# Altium PCB pcb_layout_v1.PcbDoc
Units mm, origin at the board's own origin, x right, y up, seen from the top; angles counter-clockwise.
Board outline 41.78 x 48.01 mm, 2 copper layers (Top Layer, Bottom Layer); 38 components, 28 nets, 95 pads, 10 vias.
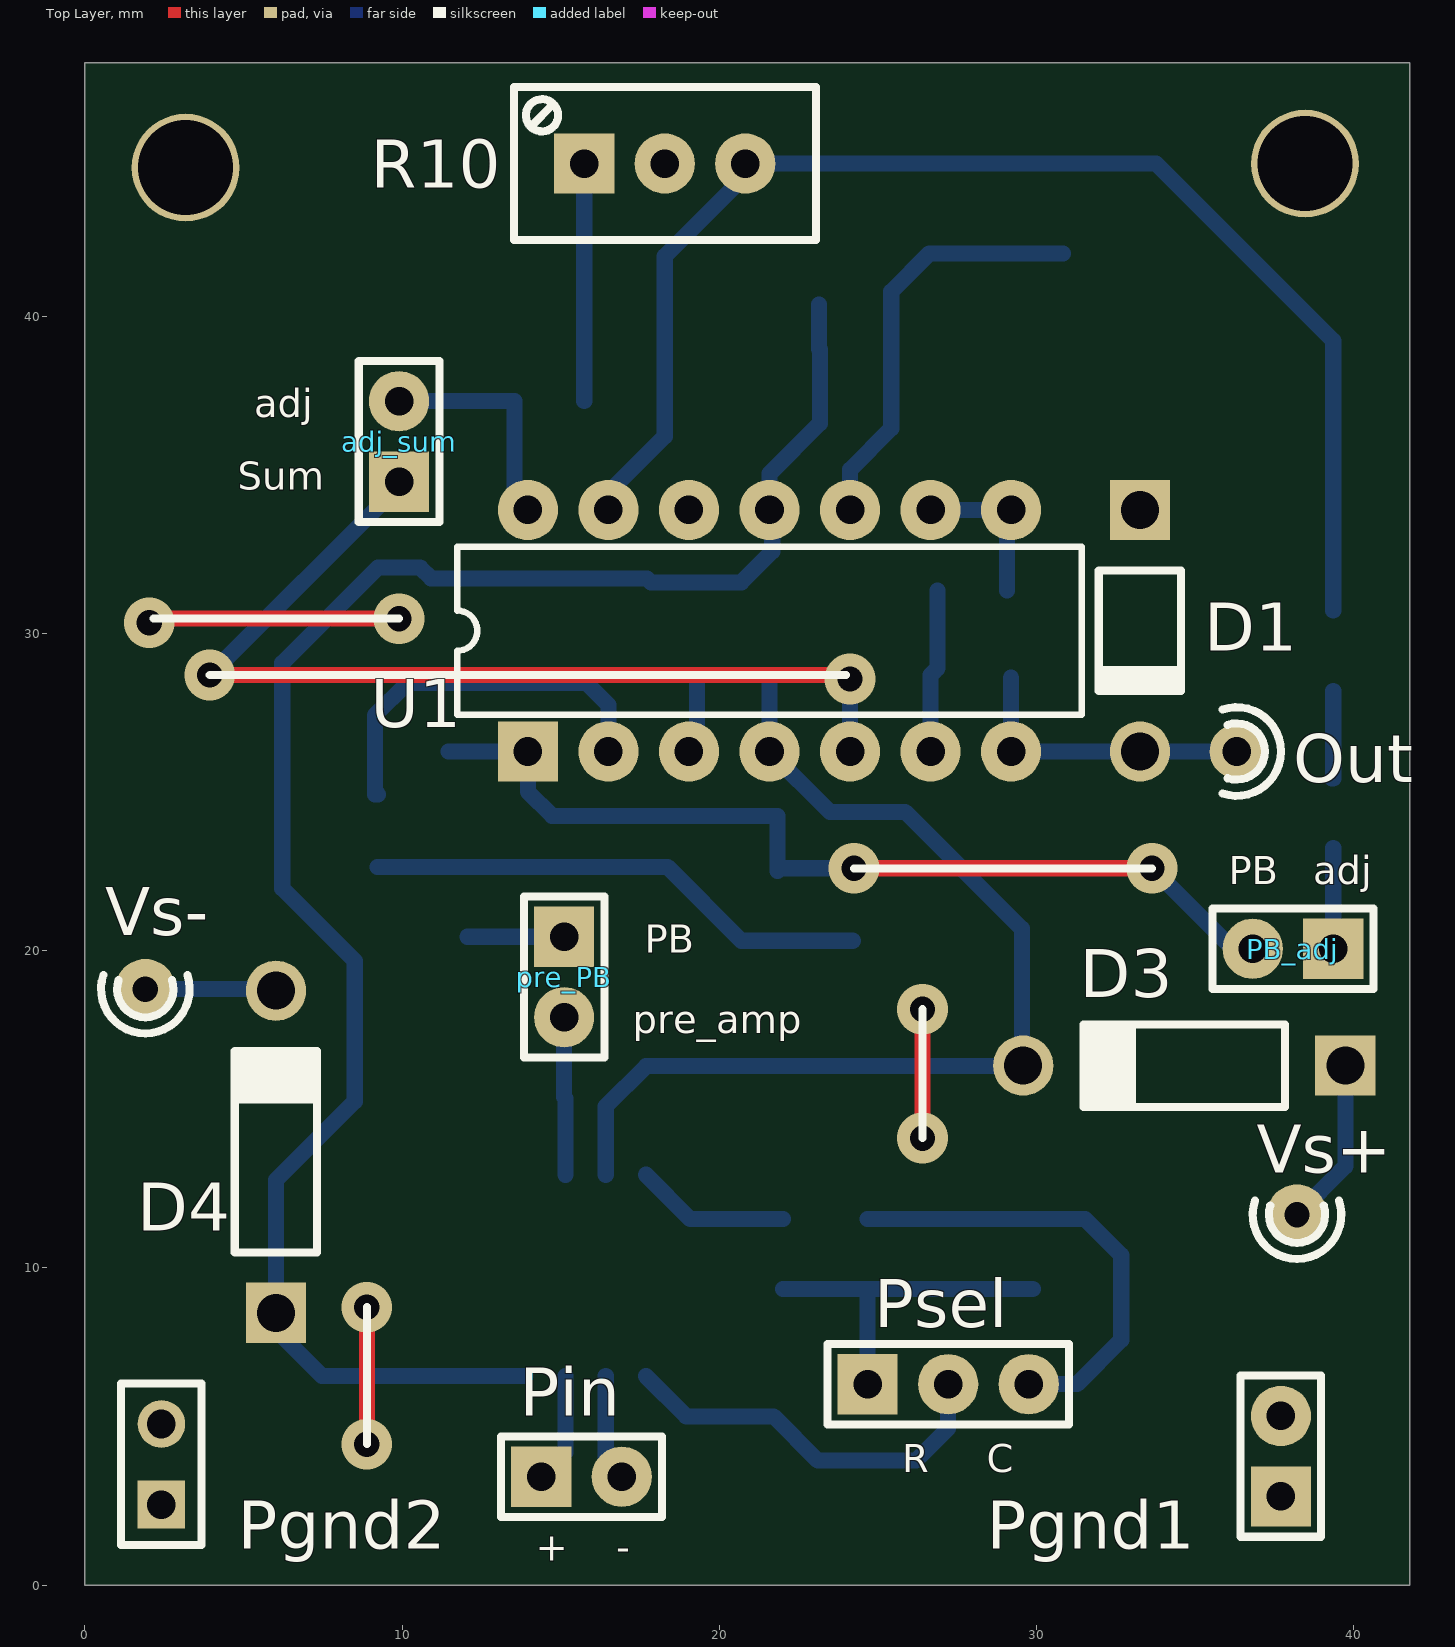
[diagram p0: Top Layer view]
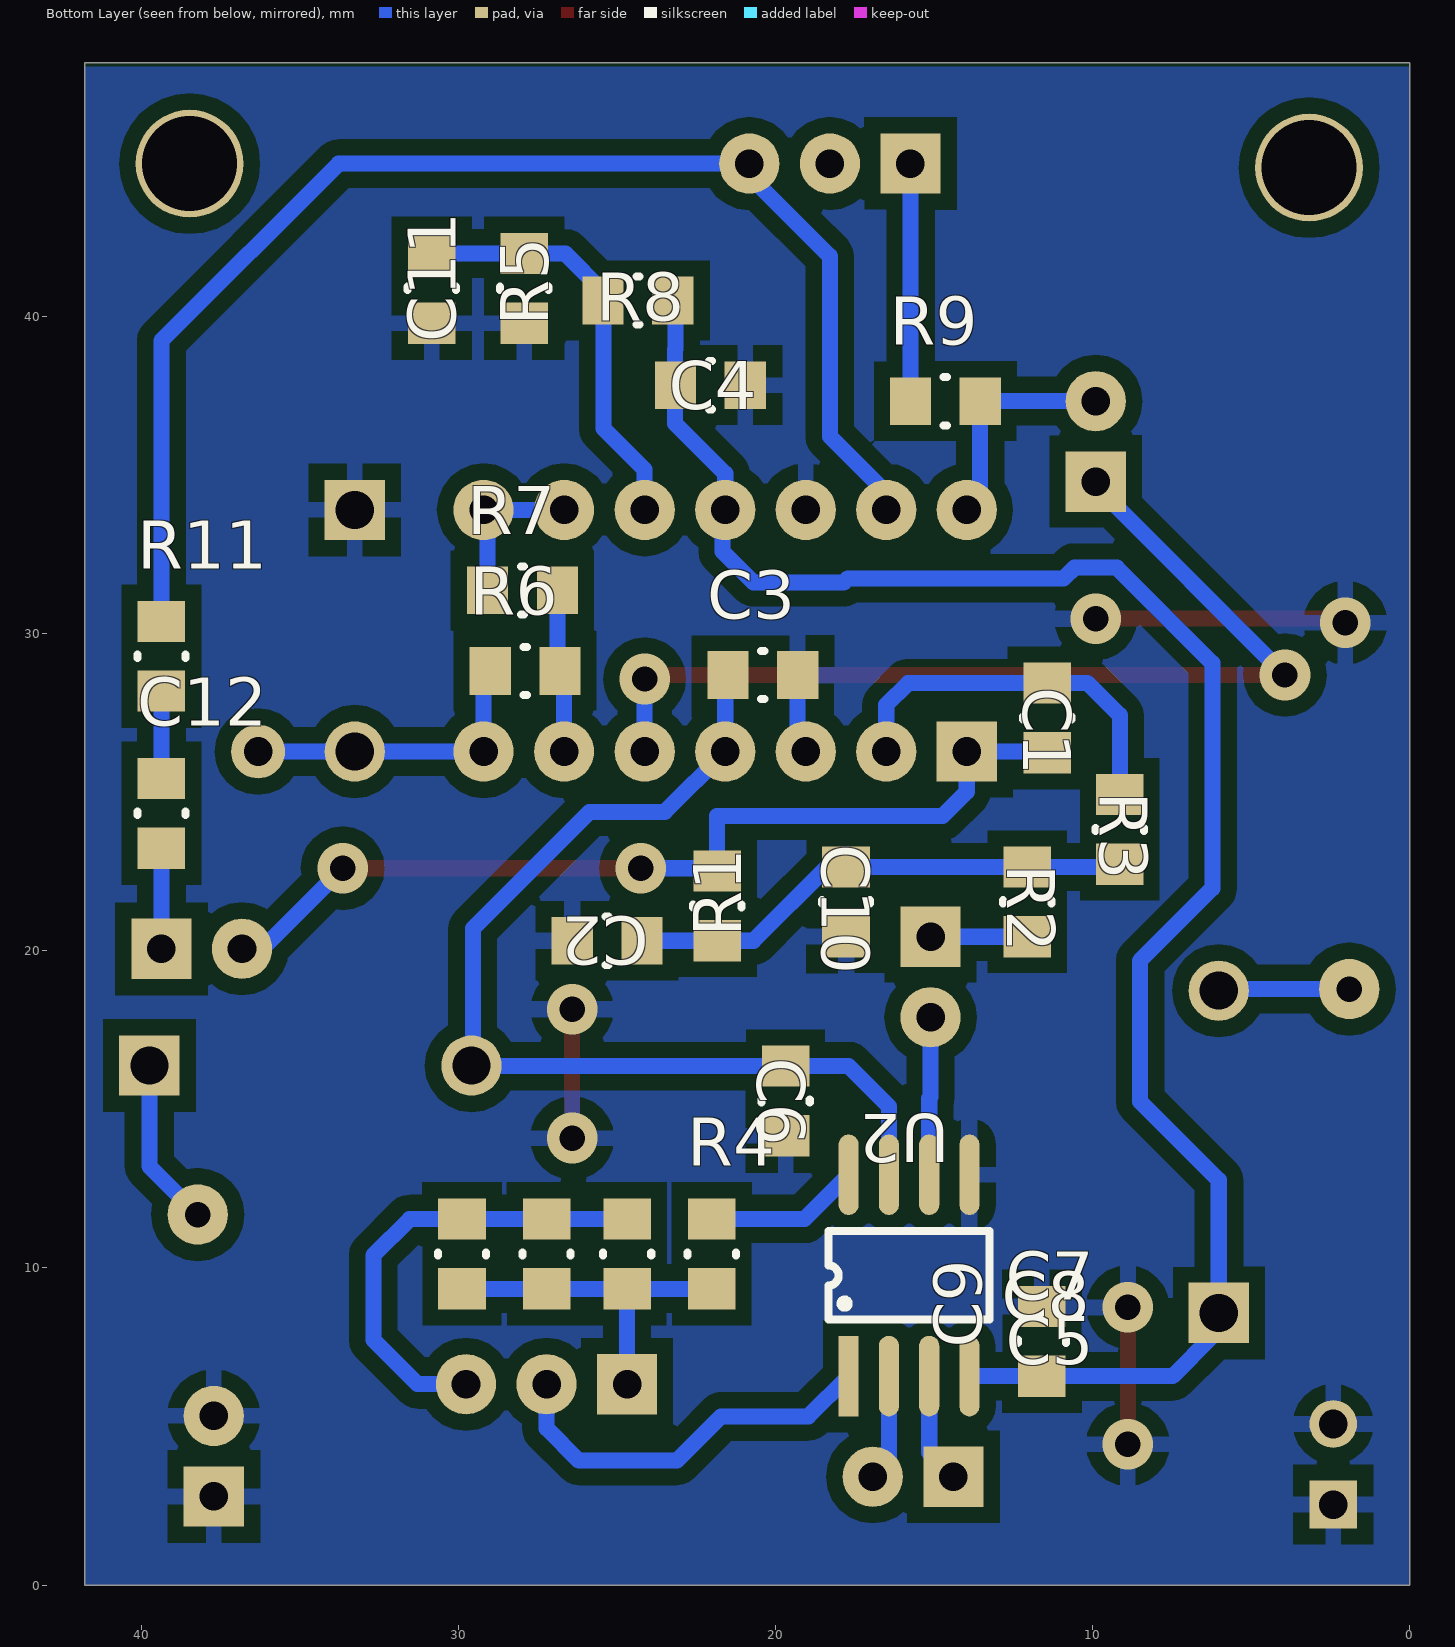
[diagram p1: Bottom Layer view, seen from below]
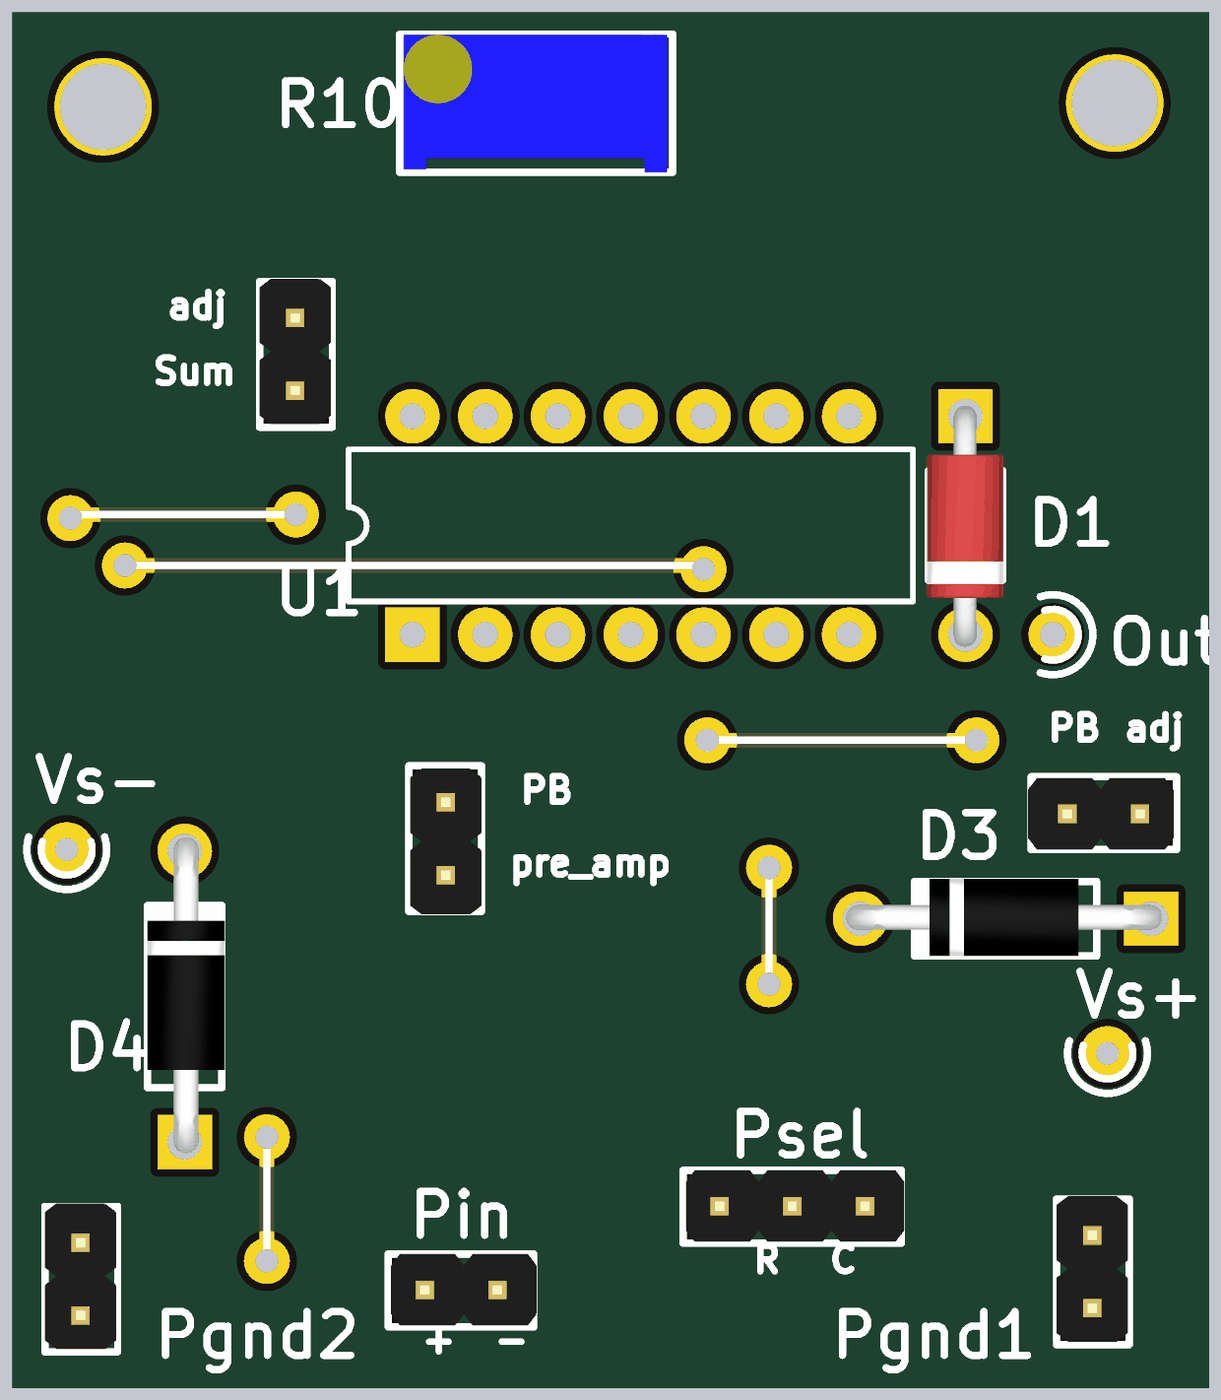
[diagram p2: 3D render of the assembled board from above, using the file's embedded part models]
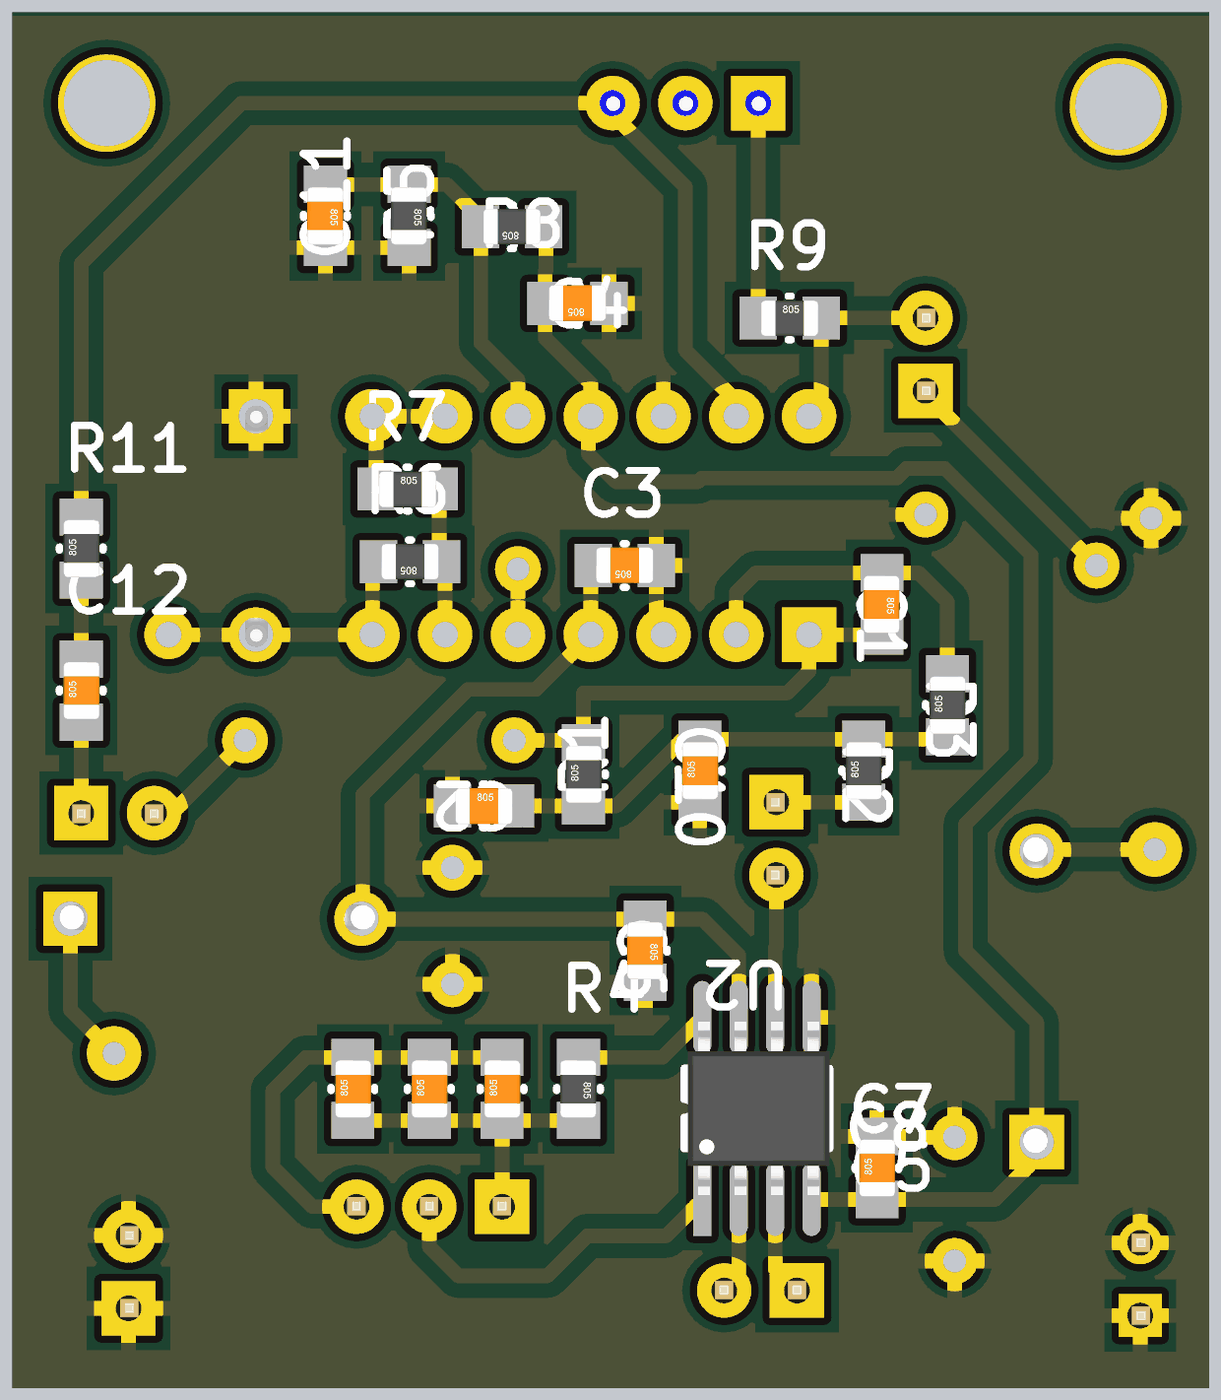
[diagram p3: 3D render of the assembled board from below, using the file's embedded part models]

## Layer stack, top to bottom
Top Solder: solder mask 0.0102, Solder Resist, Dk 3.5
Top Layer: signal copper 0.0356
Dielectric 1: dielectric 0.32, FR-4, Dk 4.8
Bottom Layer: signal copper 0.0356
Bottom Solder: solder mask 0.0102, Solder Resist, Dk 3.5

## Board outline
0,0 0,48.006 41.783,48.006 41.783,0

## Design rules (kind name [scope] priority, off if disabled: settings)
Clearance [All] p1: gap=0.508
PlaneConnect PlaneConnect_1 [All] p1: planeconnectstyle=Relief reliefexpansion=0.508 reliefentries=4 reliefconductorwidth=0.254 reliefairgap=0.254
PolygonConnect [All] p1: connectstyle=Relief reliefconductorwidth=0.508 reliefentries=4 polygonreliefangle="90 Angle" airgapwidth=0.508
RoutingVias [All] p1: holewidth=0.711 width=1.27 viastyle="Through Hole" minholewidth=0.711 minwidth=1.27 maxholewidth=1.016 maxwidth=1.778
SolderMaskExpansion [All] p1: expansion=0.254 soldermaskfromhole=TRUE
Width [All] p1: maxlimit=0.508 minlimit=0.508 preferedwidth=0.508 minimp=50.000000 maximp=50.000000 favimp=50.000000
29 further rules are at their usual default settings.

## Classes and differential pairs
component class Designator: C5 C6 C7 C8 C9 Pin Psel R4 U2
component class not_sure_yet: D3 D4 pre_PB

## Components (designator, comment, footprint, x,y, rotation, side; value= is the part's Value field where it differs from the comment)
adj_sum "Header_1x2" HDR-M-1x2-2.54mm-180-9.2mm#1 9.906,34.798 r90 top
C1 "1,2pF" 0805C 11.43,28.448 r270 bottom
C2 "22nF" 0805C 26.416,20.32 r180 bottom
C3 "100nF" 0805C 19.304,28.702 r0 bottom
C4 "100nF" 0805C 20.955,37.846 r0 bottom
C5 "4.7uF" 0805C 27.224,9.344 r90 bottom
C6 "100nF" 0805C 19.685,16.37 r270 bottom
C7 "2.2uF" 0805C 24.684,9.344 r90 bottom
C8 "100nF" 0805C 29.891,9.344 r90 bottom
C9 "100nF" 0805C 11.601,6.589 r90 bottom
C10 "15nF" 0805C 17.78,20.447 r90 bottom
C11 "100nF" 0805C 30.849,41.996 r270 bottom
C12 "100nF" 0805C 39.37,23.241 r90 bottom
D1 "1N4728A" DO-41-Glass 33.274,33.909 r270 top
D3 "1N5819" DO-41-Plastic 39.751,16.383 r180 top
D4 "1N5819" DO-41-Plastic 6.024,8.586 r90 top
Out "TestPoint" TEST_POINT_PTH#1 36.322,26.289 r90 top (schematic designator TP1)
PB_adj "Header_1x2" HDR-M-1x2-2.54mm-180-9.2mm#1 39.37,20.066 r180 top
Pgnd1 "Header_1x2" HDR-M-1x2-2.54mm-180-9.2mm#1 37.719,2.794 r90 top
Pgnd2 "Header_1x2" HDR-M-1x2-2.54mm-180-9.2mm#2 2.413,2.54 r90 top
Pin "Header_1x2" HDR-M-1x2-2.54mm-180-9.2mm#1 14.393,3.416 r0 top
pre_PB "Header_1x2" HDR-M-1x2-2.54mm-180-9.2mm#1 15.113,20.447 r270 top
Psel "Header_1x3" HDR-M-1x3-2.54mm-180-9.2mm 24.684,6.337 r0 top
R1 "220k" 0805R 21.844,20.32 r90 bottom
R2 "18k" 0805R 12.065,20.447 r90 bottom
R3 "39k" 0805R 9.144,22.733 r90 bottom
R4 "2k" 0805R 22.017,11.544 r270 bottom
R5 "330k" 0805R 27.928,41.996 r270 bottom
R6 "10k" 0805R 26.797,28.829 r0 bottom
R7 "10k" 0805R 29.083,31.369 r180 bottom
R8 "680k" 0805R 23.241,40.513 r0 bottom
R9 "510" 0805R 15.748,37.338 r180 bottom
R10 "10k" Trimpot-3296W 15.748,44.831 r0 top
R11 "1k" 0805R 39.37,28.194 r90 bottom
U1 "LM324N" N014 21.59,30.099 r0 top
U2 "INA118" SOIC08-150(50) 17.695,6.591 r180 bottom
Vs+ "TestPoint" TEST_POINT_PTH#2 38.227,11.684 r0 top
Vs- "TestPoint" TEST_POINT_PTH#2 1.905,18.796 r0 top

## Footprints (in the part's own frame and the unit in brackets; to place one, negate y for a bottom-side part, rotate by r counter-clockwise, add the part's x,y. Pads: shape width x height; smd on the part's side, far side on the other; paste and mask are expansions set on the pad)
0805C [mm] "Chip Capacitor; Body 2 x 1.3 mm (LxW typ)"
  rect 1.3x1.5 smd: 1(0,0) 2(2.2,0)
  silkscreen extent 1.05,-0.76 1.15,0.76, body extent 0.1,-0.64 2.1,0.61, height 0.78
0805R [mm] "Chip Resistor; Body 2 x 1.3 mm (LxW typ)"
  rect 1.3x1.5 smd: 1(0,0) 2(2.2,0)
  silkscreen extent 1.05,-0.76 1.15,0.76, body extent 0.1,-0.64 2.1,0.61, height 0.78
DO-41-Glass [mm] "Diode, Axial; Body 4.1 x 2.6 mm (LxDia. max), Lead Dia. 0.86 mm (max), Lead Spacing 7.62 mm; 3D Julien THIEREN"
  rect 1.9x1.9 hole 1.2: A(0,0)
  round 1.9 hole 1.2: K(7.62,0)
  silkscreen extent 1.9,-1.3 5.71,1.3, body extent -0.37,-1.35 8.04,1.32, height 2.81
DO-41-Plastic [mm] "Diode, Axial; Body 4.1 x 2.6 mm (LxDia. max), Lead Dia. 1.14 mm (max), Lead Spacing 10.16 mm; 3D Wagner Bernardo"
  rect 1.9x1.9 hole 1.2: A(0,0)
  round 1.9 hole 1.2: K(10.16,0)
  silkscreen extent 1.91,-1.33 8.26,1.3, body extent -0.38,-1.4 10.64,1.3, height 2.84
HDR-M-1x2-2.54mm-180-9.2mm#1 [mm] "Male Header, 1 line 2 rows, 180 degrees, 9.2 mm length"
  rect 1.9x1.9 hole 0.9: 1(0,0)
  round 1.9 hole 0.9: 2(2.54,0)
  silkscreen extent -1.27,-1.27 3.81,1.27, body extent -1.17,-1.22 3.91,1.27, height 6.2
HDR-M-1x2-2.54mm-180-9.2mm#2 [mm] "Male Header, 1 line 2 rows, 180 degrees, 9.2 mm length"
  rect 1.5x1.5 hole 0.9: 1(0,0)
  round 1.5 hole 0.9: 2(2.54,0)
  silkscreen extent -1.27,-1.27 3.81,1.27, body extent -1.17,-1.22 3.91,1.27, height 6.2
HDR-M-1x3-2.54mm-180-9.2mm [mm] "Male Header, 1 line 3 rows, 180 degrees, 9.2 mm length"
  rect 1.9x1.9 hole 0.9: 1(0,0)
  round 1.9 hole 0.9: 2(2.54,0) 3(5.08,0)
  silkscreen extent -1.27,-1.27 6.35,1.27, body extent -1.17,-1.22 6.45,1.27, height 6.2
N014 [mm] "DIP; 14 Leads; Row Spacing 7.62 mm; Pitch 2.54 mm"
  rect 1.9x1.9 hole 0.9: 1(-7.62,-3.81)
  round 1.9 hole 0.9: 2(-5.08,-3.81) 3(-2.54,-3.81) 4(0,-3.81) 5(2.54,-3.81) 6(5.08,-3.81) 7(7.62,-3.81) 8(7.62,3.81) 9(5.08,3.81) 10(2.54,3.81) 11(0,3.81) 12(-2.54,3.81) 13(-5.08,3.81) 14(-7.62,3.81)
  silkscreen extent -9.85,-2.65 9.85,2.65
SOIC08-150(50) [mm] "SOIC 8 Leads; Row Spacing 3.81 mm; Pitch 1.27 mm; 3D André L´Hérault"
  rect 0.635x2.54 smd: 1(0,0)
  oval 0.635x2.54 smd: 2(1.27,0) 3(2.54,0) 4(3.81,0) 5(3.81,6.35) 6(2.54,6.35) 7(1.27,6.35) 8(0,6.35)
  silkscreen extent -0.63,1.78 4.45,4.57, body extent -0.51,0.15 4.44,6.2, height 1.88
TEST_POINT_PTH#1 [mm] "Test Point PTH"
  round 1.7 hole 0.9: 1(0,0)
  silkscreen extent -1.4,-1.4 1.4,0.44
TEST_POINT_PTH#2 [mm] "Test Point PTH"
  round 1.9 hole 0.8: 1(0,0)
  silkscreen extent -1.4,-1.4 1.4,0.44
Trimpot-3296W [mm] "Trimpot 3296W"
  rect 1.9x1.9 hole 0.9: 1(0,0)
  round 1.9 hole 0.9: 2(2.54,0) 3(5.08,0)
  silkscreen extent -2.22,-2.41 7.3,2.41, body extent -2.09,-2.41 7.11,2.39, height 12.05

## Part data
adj_sum PB_adj Pgnd1 Pgnd2 Pin pre_PB: "Header, 1 Line, 2 Columns, 2 Pins"
C1 C2 C3 C4 C5 C6 C7 C8 C9 C10 C11 C12: library part Capacitor, "Capacitor"
D1: "Zener Diode"
D3 D4: library part 1N4007, "General Purpose Rectifier"
Out Vs+ Vs-: "Test Point"
Psel: "Header, 1 Line, 3 Columns, 3 Pins"
R1 R2 R3 R4 R5 R6 R7 R8 R9 R11: library part Resistor, "Resistor"
R10: library part Trimpot, "Trimpot"
U1: "Quadruple Operational Amplifier"
U2: "Precision, Low Power Instrumentation Amplifier"

## Free pads (board coordinates)
  round 3.4 hole 3: 0(3.175,44.704) 1(38.481,44.831)

## Via types
v1: diameter 1.6, hole 0.8, Top Layer to Bottom Layer, 10 vias

## Nets (pads, with @x,y where several pads share a name; then routed paths per layer and width w, separated by ;. In a path a pad name is that pad's centre, name@x,y a point inside that pad or via, vN(x,y) a via of type N, cw(c..) or ccw(c..) an arc to the next point about the centre after c; other vN are vias at no path point)
GND: C2.1 C3.1 C4.1 C6.2 C9.2 C10.1 C11.2 D1.A Pgnd1.1 Pgnd1.2 Pgnd2.1 Pgnd2.2 R5.2 U1.3 U1.12 U2.5 | length 18.8
  Top Layer w0.508: v1(2.032,30.353) 2.159,30.48 v1(9.906,30.48) ; v1(8.89,4.445) v1(8.89,8.763) ; v1(26.416,14.097) v1(26.416,18.161)
  Bottom Layer w0.508: U1.3 19.304,26.543 C3.1
Netadj_sum_1: adj_sum.1 U1.5 | length 31.8
  Top Layer w0.508: v1(3.937,28.702) 3.937,28.829 4.064,28.702 24.257,28.702 24.13,28.829 v1(24.13,28.575)
  Bottom Layer w0.508: v1@3.937,28.829 v1(3.937,28.702) adj_sum.1@9.906,34.671 ; U1.5 v1(24.13,28.575)
Netadj_sum_2: adj_sum.2 R9.2 U1.14 | length 7.2
  Bottom Layer w0.508: adj_sum.2 R9.2 13.548,34.331 U1.14
NetC1_1: C1.1 R3.2 U1.2 | length 12.2
  Bottom Layer w0.508: R3.2 9.244,24.933 9.144,25.033 9.144,27.432 10.16,28.448 C1.1 15.822,28.448 16.51,27.76 U1.2
NetC1_2: C1.2 PB_adj.2 R1.2 U1.1 | length 29.4
  Top Layer w0.508: v1(24.257,22.606) v1(33.655,22.606)
  Bottom Layer w0.508: C1.2@11.471,26.289 U1.1 ; U1.1@13.97,26.035 13.97,25.019 14.732,24.257 21.844,24.257 R1.2 ; R1.2@21.93,22.606 v1(24.257,22.606) ; v1(33.655,22.606) 36.195,20.066 PB_adj.2
NetC2_2: C2.2 C10.2 R1.1 R2.2 R3.1 | length 15.9
  Bottom Layer w0.508: R3.1@9.23,22.647 R2.2 C10.2 18.374,22.647 20.701,20.32 R1.1 C2.2
NetC5_2: C5.2 C7.2 C8.2 Psel.3 | length 14.6
  Bottom Layer w0.508: C7.2 C5.2 C8.2 31.542,11.544 32.685,10.401 32.685,7.734 31.288,6.337 Psel.3
NetC11_1: C11.1 R5.1 R8.2 U1.10 | length 13.3
  Bottom Layer w0.508: U1.10 24.13,35.179 25.429,36.478 25.429,40.796 26.629,41.996 R5.1 C11.1
NetC12_1: C12.1 PB_adj.1 | length 3.2
  Bottom Layer w0.508: PB_adj.1 C12.1
NetC12_2: C12.2 R11.1 | length 2.8
  Bottom Layer w0.508: C12.2@39.329,25.441 C12.2 R11.1
NetD1_K: D1.K Out.1 R6.2 U1.7 | length 9.2
  Bottom Layer w0.508: R6.2@29.21,28.616 U1.7 D1.K Out.1@36.068,26.289
NetD3_A: D3.A Vs+.1 | length 5.3
  Bottom Layer w0.508: Vs+.1 39.751,13.208 D3.A
NetD4_K: D4.K Vs-.1 | length 4.1
  Bottom Layer w0.508: Vs-.1 D4.K@5.974,18.796
Netpre_PB_1: pre_PB.1 R2.1 | length 3
  Bottom Layer w0.508: R2.1 pre_PB.1
NetPsel_2: Psel.2 U2.1 | length 12.5
  Bottom Layer w0.508: U2.1 18.965,5.321 21.717,5.321 23.114,3.924 26.208,3.924 27.224,4.94 Psel.2
NetR4_1: R4.1 U2.8 | length 4.9
  Bottom Layer w0.508: U2.8 19.092,11.544 R4.1
NetR6_1: R6.1 R7.2 U1.6 | length 5.2
  Bottom Layer w0.508: U1.6 26.67,28.702 R6.1 26.883,28.915 R7.2
NetR7_1: R7.1 U1.8 U1.9 | length 5
  Bottom Layer w0.508: U1.9 U1.8 ; R7.1 U1.8@29.083,33.782
NetR9_1: R9.1 R10.1 | length 6.6
  Bottom Layer w0.508: R9.1 R10.1@15.748,43.953
NetR10_3: R10.3 R11.2 U1.13 | length 42.1
  Bottom Layer w0.508: U1.13 16.51,34.447 18.288,36.225 18.288,41.91 20.828,44.45 R10.3 33.782,44.831 39.37,39.243 R11.2@39.37,30.734
PATH2: C5.1 C7.1 C8.1 Psel.1 R4.2 | length 10.9
  Bottom Layer w0.508: R4.2 C7.1 ; Psel.1 C7.1 ; C8.1 C5.1 C7.1
VCC+_1: C3.2 C6.1 D3.K U1.4 U2.7 | length 32.7
  Bottom Layer w0.508: U2.7 16.425,15.096 17.699,16.37 C6.1 D3.K@29.591,16.37 ; C3.2@21.59,28.616 U1.4 23.495,24.384 25.866,24.384 29.549,20.701 D3.K@29.549,16.425
VCC+_2: 
VCC-_1: C4.2 C9.1 D4.A R8.1 U1.11 U2.4 | length 56.3
  Bottom Layer w0.508: D4.A 6.024,12.772 8.509,15.257 8.509,19.685 6.223,21.971 6.223,29.077 9.238,32.092 10.574,32.092 10.916,31.75 17.724,31.75 17.851,31.623 20.701,31.623 21.676,32.598 U1.11@21.676,33.823 ; D4.A@6.223,7.843 7.478,6.589 C9.1 11.603,6.591 U2.4 ; U1.11 21.59,35.052 23.177,36.639 23.177,38.967 ; 23.155,38.989 R8.1@23.155,40.386
VCC-_2: 
VIN+: Pin.1 U2.3 | length 3.5
  Bottom Layer w0.508: Pin.1 15.155,4.178 U2.3
VIN-: Pin.2 U2.2 | length 3.4
  Bottom Layer w0.508: U2.2 16.425,3.924 Pin.2
VOUT: pre_PB.2 U2.6 | length 5
  Bottom Layer w0.508: pre_PB.2 15.113,15.392 15.155,15.35 U2.6
pads on no net: R10.2

## Polygon pours and split planes (outlines as drawn)
GND on Bottom Layer "ground_plane" (solid, pour order 4): 0,0 0,47.879 41.783,47.879 41.783,0

## Silkscreen, mask and mechanical layers (free items; w line width, h text height)
Top Overlay:
  lines w0.254: 2.159,30.48 9.906,30.48 ; 3.937,28.702 24.003,28.702 ; 8.89,4.445 8.89,8.763 ; 24.257,22.606 33.655,22.606 ; 26.416,14.097 26.416,18.161
  text "adj" at 5.334,36.83 h0.89
  text "Sum" at 4.826,34.544 h0.89
  text "PB" at 36.068,22.098 h0.89
  text "adj" at 38.735,22.098 h0.89
  text "PB" at 17.653,19.939 h0.89
  text "pre_amp" at 17.272,17.399 h0.89
  text "R" at 25.781,3.556 h0.89
  text "C" at 28.448,3.556 h0.89
  text "+" at 14.224,0.762 h0.89
  text "-" at 16.764,0.762 h0.89